# EAGLE board PR5005V1.3 (EAGLE 6.5.0)
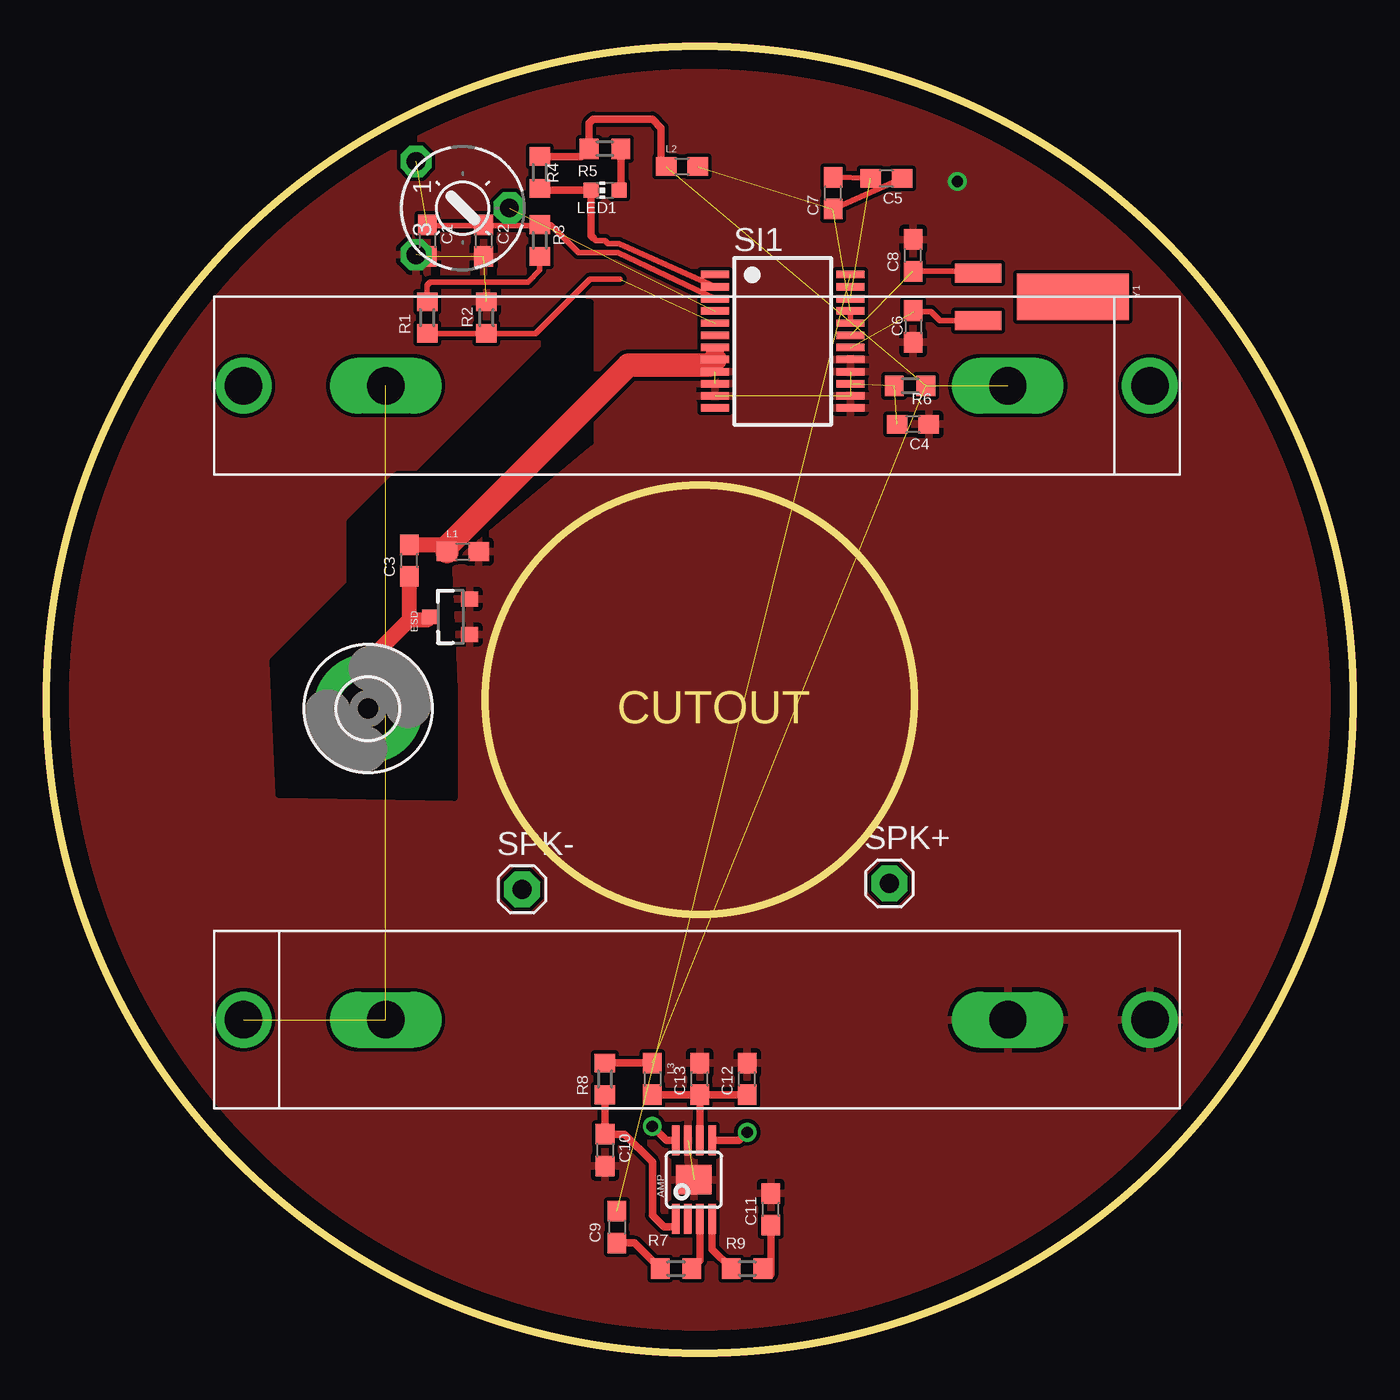
[diagram p0: board, top side]
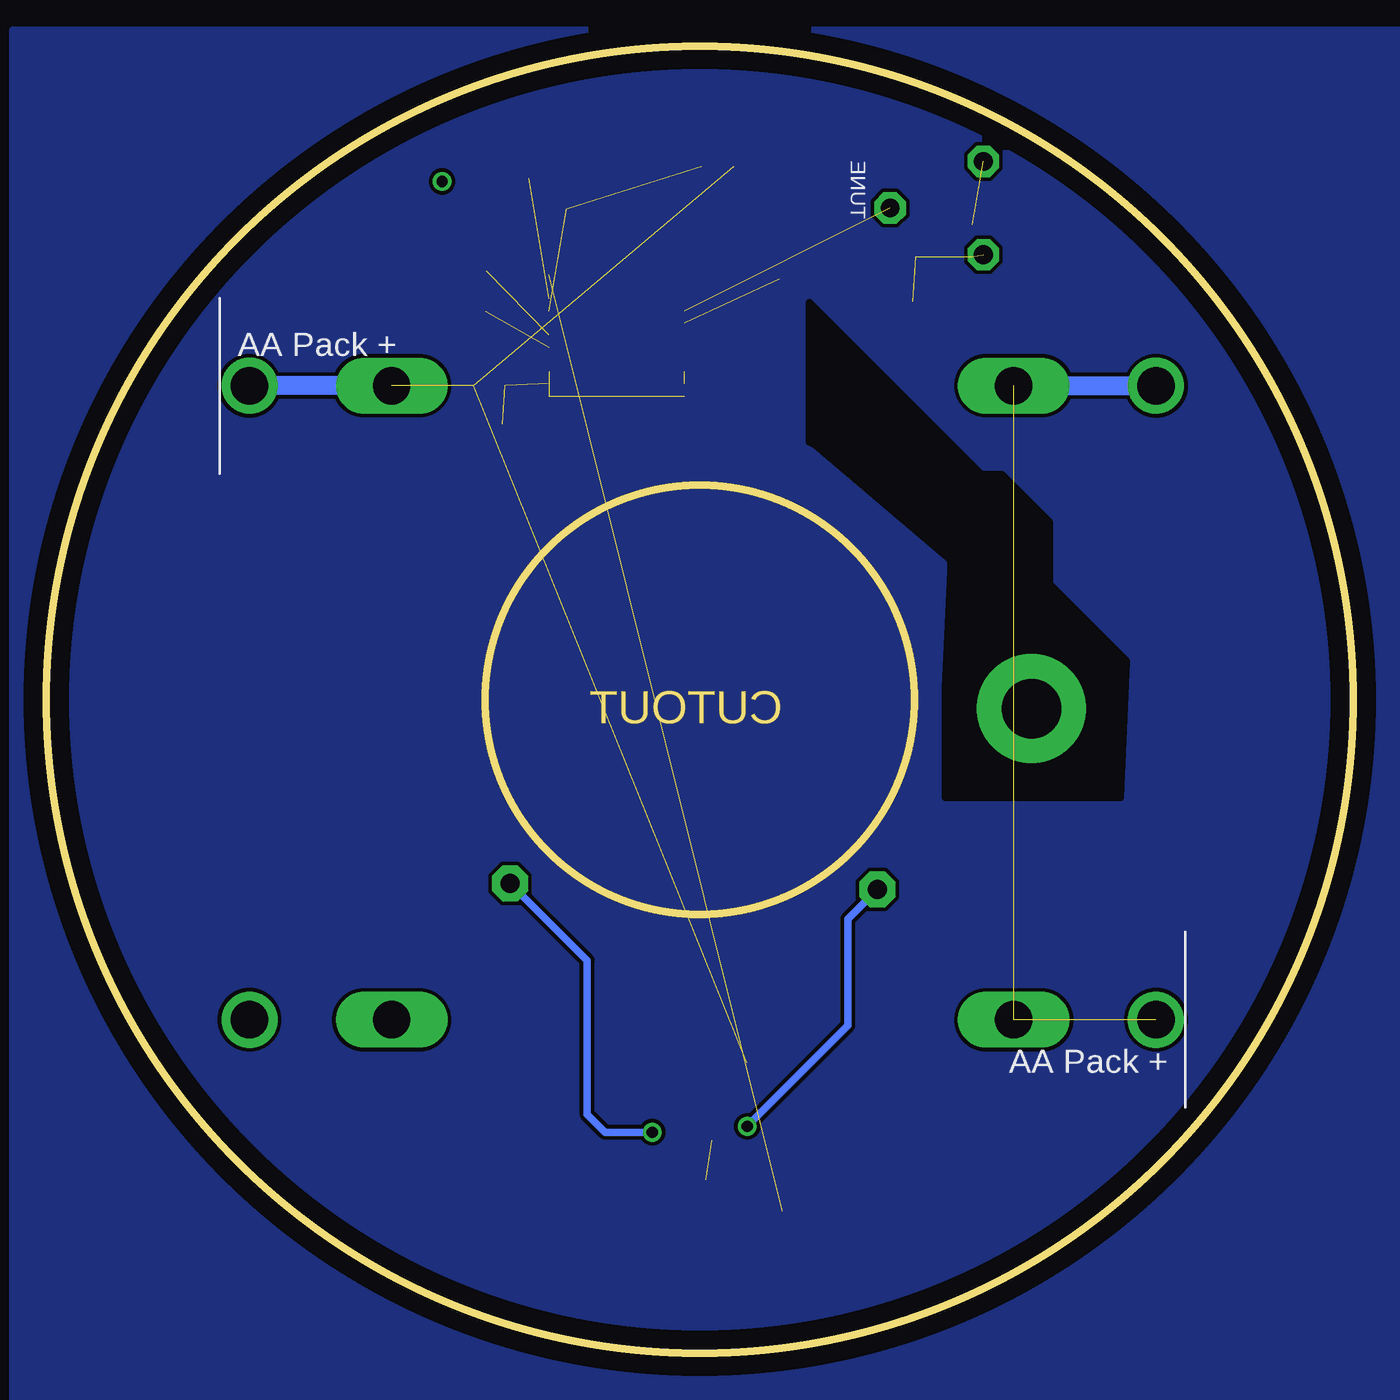
[diagram p1: board, bottom side, seen from below]

Size 70 x 70 mm. Coordinates in mm from the lower left corner, seen from the top.
Outline: circle at 35,35 radius 35
Copper layers (1*16): Top 0.035mm / dielectric 1.5mm / Bottom 0.035mm
Design rules "default": minimum track width 10mil, minimum drill 24mil, track to track 8mil, track to pad 8mil, pad to pad 8mil, via to via 8mil, smd to smd 8mil, copper to edge 40mil, drill to drill 8mil, minimum pad ring 10mil, minimum via ring 8mil, stop-mask expansion 4mil, vias tented up to drill 0mil, thermal gap 10mil
tRestrict: area 12.1,29.8 to 29.1,56.3
bRestrict: area 12.1,29.8 to 29.1,56.3
Milling: area 23.5,23.5 to 46.5,46.5

## Footprints (pad centres in the part's own frame; a part is rotated, then mirrored left to right if it is on the bottom)
POWER-SOP8 = smd 0.4 x 1.6: 1 -0.975,-2.1; 2 -0.325,-2.1; 3 0.325,-2.1; 4 0.975,-2.1; 5 0.975,2.1; 6 0.325,2.1; 7 -0.325,2.1; 8 -0.975,2.1 | smd 1.89 x 1.57: 9 0,0
C0603 = smd 1.1 x 1: 1 -0.85,0; 2 0.85,0
SOT23-3 = smd 0.8 x 0.9: 1 -0.95,-1; 2 0.95,-1; 3 0,1.1
3,2-PAD = drill 3.2 pad 5.842: B3,2 0,0
0603 = smd 1.1 x 1: 1 -0.85,0; 2 0.85,0
CHIP-LED0603 = smd 0.8 x 0.8: A 0,-0.75; C 0,0.75
R0603 = smd 1 x 1.1: 1 -0.85,0; 2 0.85,0
SI4831-SSOP-24 = smd 0.4 x 1.5: 1 -3.575,-3.625; 2 -2.925,-3.625; 3 -2.275,-3.625; 4 -1.625,-3.625; 5 -0.975,-3.625; 6 -0.325,-3.625; 7 0.325,-3.625; 8 0.975,-3.625; 9 1.625,-3.625; 10 2.275,-3.625; 11 2.925,-3.625; 12 3.575,-3.625; 13 3.575,3.625; 14 2.925,3.625; 15 2.275,3.625; 16 1.625,3.625; 17 0.975,3.625; 18 0.325,3.625; 19 -0.325,3.625; 20 -0.975,3.625; 21 -1.625,3.625; 22 -2.275,3.625; 23 -2.925,3.625; 24 -3.575,3.625
1X01 = drill 1.016 pad 1.93 octagon: 1 0,0
6MM = drill 1 pad 1.676 octagon: A -2.5,-2.5; E 2.5,-2.5; S 0,2.5
MPD-BK-92-AA-CLIP = drill 2 long: + 0,0; - 33.337,0 | drill 2: +1 -7.62,0; -1 40.958,0
CRYSTAL-32KHZ-SMD = smd 2.5 x 6: SHEILD 0,5.08 | smd 1 x 2.5: X1 -1.27,0; X2 1.27,0

## Placement (x,y rotation side)
AMP  TPA2005D1DGN  [POWER-SOP8]  34.68,9.28 0 top
C1  47uF  [C0603]  20.39,59.61 270 top
C2  .1uF  [C0603]  23.41,59.61 270 top
C3  1nF  [C0603]  19.44,42.46 90 top
C4  .1uf  [C0603]  46.43,49.76 180 top
C5  .1uf  [C0603]  45,62.94 180 top
C6  22pF  [C0603]  46.43,55 270 top
C7  4.7uf  [C0603]  42.14,62.15 90 top
C8  22pF  [C0603]  46.43,58.81 90 top
C9  1uf  [C0603]  30.55,6.74 270 top
C10  10uf  [C0603]  29.92,10.87 270 top
C11  1uf  [C0603]  38.81,7.69 90 top
C12  10uf  [C0603]  37.54,14.68 90 top
C13  1uf  [C0603]  35,14.68 90 top
ESD  MMBZ27VCLT1  [SOT23-3]  21.66,39.44 90 top
FM_ANT  MOUNT-PAD-ROUND3.2  [3,2-PAD]  17.22,34.52 0 top
L1  56nH  [0603]  22.3,42.94 0 top
L2  [0603]  34.05,63.57 0 top
L3  [0603]  32.46,14.68 270 top
LED1  [CHIP-LED0603]  29.92,62.3 90 top
R1  412K  [R0603]  20.39,55.48 90 top
R2  77K  [R0603]  23.57,55.48 270 top
R3  1K  [R0603]  26.43,59.61 90 top
R4  10K  [R0603]  26.43,63.26 90 top
R5  220  [R0603]  29.92,64.53 180 top
R6  100K  [R0603]  46.27,51.83 0 top
R7  59K  [R0603]  33.73,4.52 0 top
R8  10K  [R0603]  29.92,14.68 90 top
R9  59K  [R0603]  37.54,4.52 180 top
SI1  [SI4831-SSOP-24]  39.44,54.21 270 top
SPK+  [1X01]  45.16,25.16 0 top
SPK-  [1X01]  25.47,24.84 0 top
TUNE  100K  [6MM]  22.3,61.35 270 top
U$1  MPD-BK-92-AA-CLIP  [MPD-BK-92-AA-CLIP]  51.51,51.83 0 bottom
U$2  MPD-BK-92-AA-CLIP  [MPD-BK-92-AA-CLIP]  18.17,17.85 180 bottom
Y1  [CRYSTAL-32KHZ-SMD]  49.92,56.59 270 top

## Library data of the parts
AMP = SparkFun-AnalogIC
C1-C13 R1-R9 = resistor
ESD = SparkFun-DiscreteSemi
FM_ANT = holes
L1-L3 = SparkFun-Passives
LED1 SPK+ SPK- TUNE = adafruit
SI1 = PublicRadioICs
U$1 U$2 = BatteryPack
Y1 = SparkFun-FreqCtrl

## Nets
GND: AMP.7 AMP.9 C1.2 C2.2 C4.1 C6.2 C8.2 C10.2 C11.2 C12.2 C13.2 ESD.1 ESD.2 L1.2 R2.1 SI1.9 SI1.10 SI1.11 SI1.13 SI1.14 SI1.16 SI1.17 TUNE.E U$2.- U$2.-1
N$1: AMP.3 R7.2
N$2: AMP.4 R9.2
N$3: C11.1 R9.1
N$4: C9.2 R7.1
N$5: C9.1 SI1.24
N$6: C5.2 C7.2 SI1.22
N$7: C8.1 SI1.19 Y1.X1
N$8: C4.2 R6.1 SI1.15
N$9: LED1.C R4.1 SI1.2
N$10: C6.1 SI1.18 Y1.X2
N$11: LED1.A R5.1
N$12: SI1.4 TUNE.S
N$13: R1.1 R2.2 SI1.5
N$14: U$1.- U$1.-1 U$2.+ U$2.+1
N$15: C3.2 L1.1 SI1.8
N$16: C5.1 C7.1 L2.2 SI1.20 SI1.21
N$17: AMP.6 C12.1 C13.1 L3.2
N$18: AMP.1 C10.1 R8.1
N$19: C3.1 ESD.3 FM_ANT.B3,2
N$20: R1.2 R3.1
N$21: C1.1 C2.1 R3.2 SI1.3 TUNE.A
N$23: AMP.5 SPK+.1
N$24: AMP.8 SPK-.1
VCC: L2.1 L3.1 R4.2 R5.2 R6.2 R8.2 U$1.+ U$1.+1

## Tracks (layer width: path | path; a pad name or v marks a point on that pad's centre or on a via)
GND  (via drill 0.6)  (7 unrouted)
  other vias: 48.81,62.78
  pour Top: -3.1,70.88 71.83,70.88 71.83,-4.69 -3.1,-4.69
N$1
  Top 0.406: R7.2 35.01,4.95 AMP.3
N$2
  Top 0.406: R9.2 35.66,5.55 AMP.4
N$3
  Top 0.406: C11.1 38.81,4.2 38.49,4.52 R9.1
N$4
  Top 0.406: R7.1 31.51,5.89 C9.2
N$5  (1 unrouted)
N$6  (1 unrouted)
  Top 0.305: C7.2 C5.2
N$7  (1 unrouted)
  Top 0.305: C8.1 49.82,57.96 Y1.X1
N$8  (2 unrouted)
N$9
  Top 0.305: 29.28,59.76 29.44,59.61 29.92,59.61 30.08,59.45 30.67,59.45 SI1.2
  Top 0.406: R4.1 26.53,62.3 LED1.C 29.17,59.88 29.28,59.76
N$10  (1 unrouted)
  Top 0.305: Y1.X2 47.86,55.32 47.38,55.8 46.49,55.8 C6.1
N$11
  Top 0.406: R5.1 30.77,62.4 LED1.A
N$12  (1 unrouted)
N$13  (1 unrouted)
  Top 0.305: R1.1 R2.2 26.21,54.63 29.13,57.54 30.72,57.54
N$14  (2 unrouted)
  Bottom 1.016: U$1.- U$1.-1
N$15
  Top 0.813: C3.2 21.08,43.31 L1.1
  Top 1.27: L1.1 21.45,43.2 31.19,52.94 35.53,52.94 SI1.8
N$16  (2 unrouted)
  Top 0.305: SI1.21 SI1.20 | C7.1 C5.1
N$17
  Top 0.406: L3.2 C13.1 | C13.1 AMP.6 | C12.1 C13.1
N$18
  Top 0.406: R8.1 C10.1 30.97,11.72 32.46,10.23 32.46,7.38 33.1,6.74 33.73,6.74 33.73,7.16 AMP.1
N$19
  Top 0.813: FM_ANT.B3,2 17.22,37.06 19.44,39.29 | 19.44,39.29 C3.1 | 19.44,39.29 20.41,39.29 ESD.3
N$20
  Top 0.305: R1.2 20.39,57.22 20.55,57.38 25.79,57.38 26.43,58.02 R3.1
N$21  (1 unrouted)
  Top 0.305: 26.32,60.4 23.47,60.4 C2.1 | 23.25,60.4 20.45,60.4 C1.1 | R3.2 27.01,60.46 28.49,58.97 30.63,58.97 SI1.3
  Top 0.406: C2.1 23.25,60.4 | 26.32,60.4 R3.2
N$22
  pour Bottom: -0.88,70.88 71.83,70.88 71.83,-4.37 -3.1,-4.37 -3.1,70.88
N$23  (via drill 0.6)
  Top 0.406: AMP.5 37.1,11.38 v37.54,11.82
  Bottom 0.406: v37.54,11.82 40.08,11.82 41.03,12.77 41.03,21.03 SPK+.1
N$24  (via drill 0.6)
  Top 0.406: AMP.8 33.22,11.38 v32.46,12.14
  Bottom 0.406: v32.46,12.14 27.06,17.54 27.06,23.25 SPK-.1
VCC  (3 unrouted)
  Top 0.406: R8.2 L3.1 | R4.2 28.65,64.11 R5.2 29.07,65.9 29.28,66.11 32.46,66.11 32.94,65.64 32.94,63.84 L2.1
  Bottom 1.016: U$1.+ U$1.+1

## Text on the board
Dimension: CUTOUT